# Altium PCB somiqboard.PcbDoc (part 5 of 10)
Units mm, origin at the board's own origin, x right, y up, seen from the top; angles counter-clockwise.
Board outline 110 x 96 mm, 4 copper layers (Top Layer, Ground_Plane, Power_Plane, Bottom Layer), stack 1.454 mm thick; 221 components, 356 nets, 1185 pads, 539 vias.
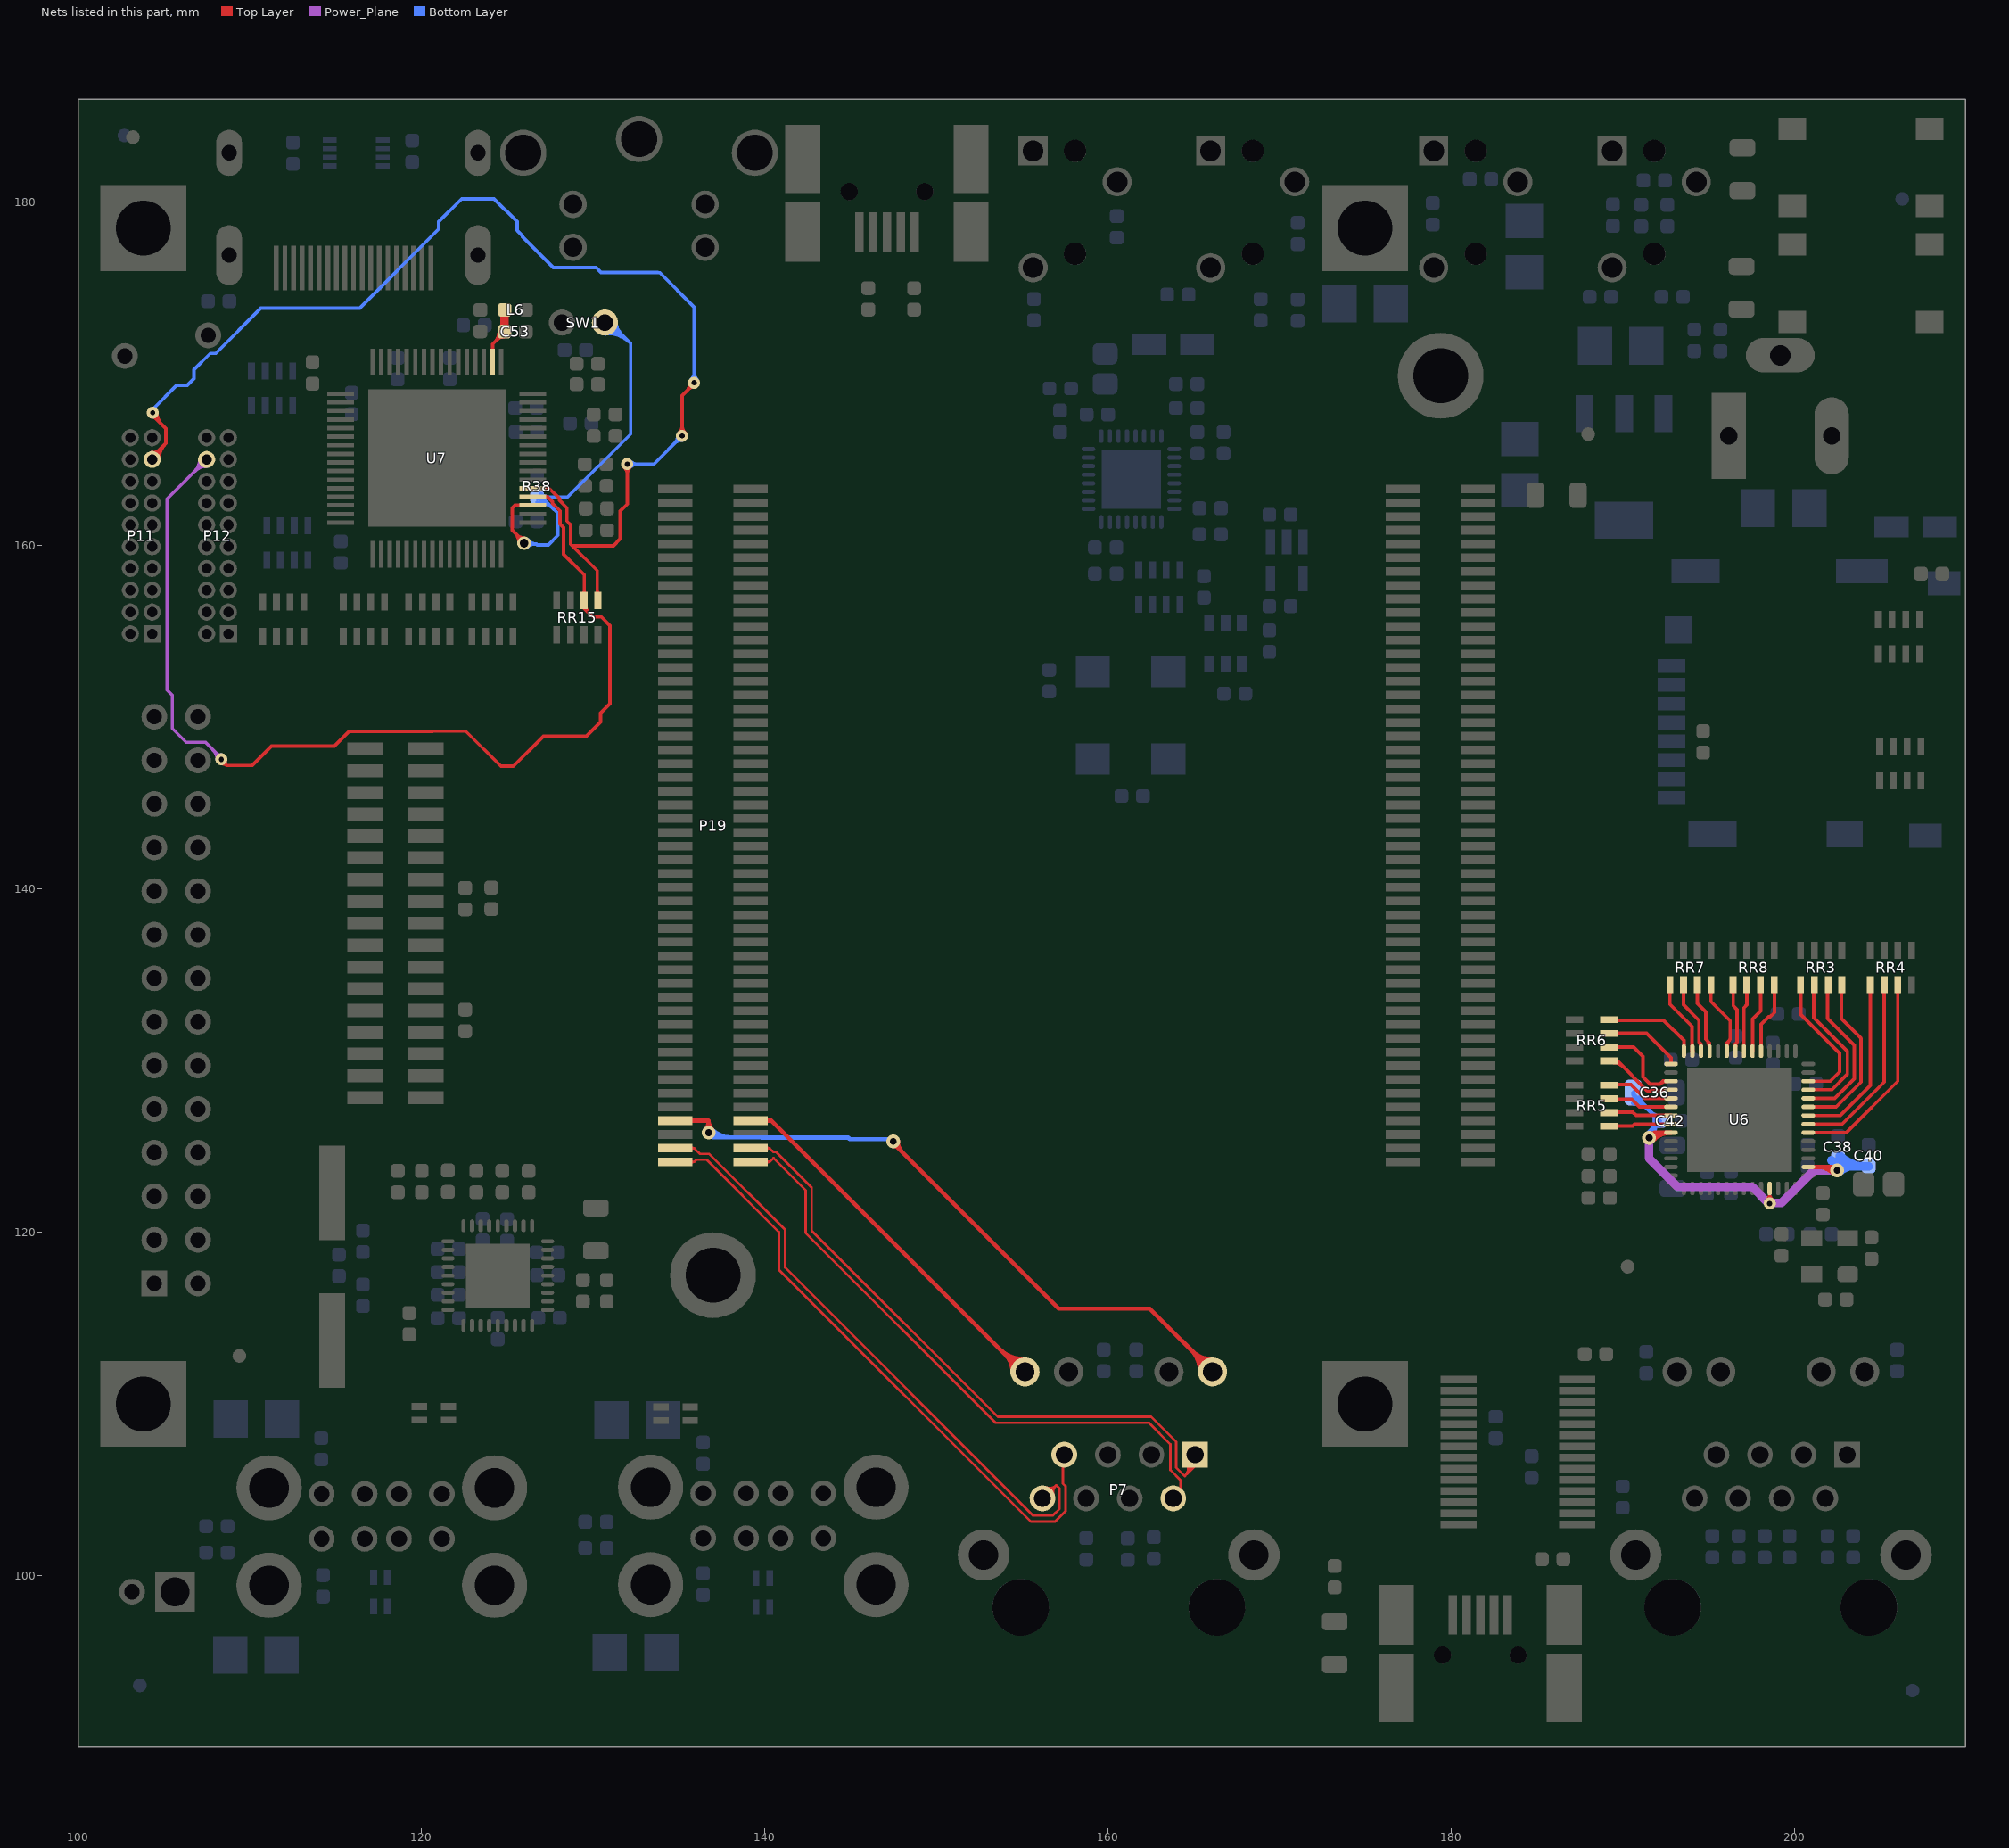
[diagram p7: the nets of this part, all layers, seen from the top]

## Via types
v1: diameter 0.7/0.7/0.7/0.7 (per signal layer), hole 0.3, Top Layer to Bottom Layer, tented both sides, 270 vias
v2: diameter 0.8, hole 0.3, Top Layer to Bottom Layer, tented both sides, 49 vias
v3: diameter 0.6/0.7/0.7/0.6 (per signal layer), hole 0.3, Top Layer to Bottom Layer, tented both sides, 47 vias
v4: diameter 0.6, hole 0.3, Top Layer to Bottom Layer, tented both sides, 43 vias
v5: diameter 1.1/1.1/1.1/1.1 (per signal layer), hole 0.6, Top Layer to Bottom Layer, tented both sides, 32 vias
v6: diameter 0.8/0.8/0.8/0.8 (per signal layer), hole 0.4, Top Layer to Bottom Layer, tented both sides, 31 vias
v7: diameter 0.9/0.9/0.9/0.9 (per signal layer), hole 0.5, Top Layer to Bottom Layer, tented both sides, 29 vias
v8: diameter 1.5/1.5/1.5/1.5 (per signal layer), hole 0.9, Top Layer to Bottom Layer, tented both sides, 14 vias
v9: diameter 1.2/1.2/1.2/1.2 (per signal layer), hole 0.6, Top Layer to Bottom Layer, tented both sides, 10 vias
v10: diameter 0.8/0.8/0.8/0.8 (per signal layer), hole 0.5, Top Layer to Bottom Layer, tented both sides, 6 vias
v11: diameter 1/1/1/1 (per signal layer), hole 0.5, Top Layer to Bottom Layer, tented both sides, 3 vias
v12: diameter 0.8/0.8/0.8/0.8 (per signal layer), hole 0.8, Top Layer to Bottom Layer, tented both sides, 2 vias
v13: diameter 1.2/1.2/1.2/1.2 (per signal layer), hole 1.2, Top Layer to Bottom Layer, tented both sides, 2 vias
v14: diameter 0.6/0.6/0.6/0.6 (per signal layer), hole 0.3, Top Layer to Bottom Layer, tented both sides, 1 vias

## Nets (pads, with @x,y where several pads share a name; then routed paths per layer and width w, separated by ;. In a path a pad name is that pad's centre, name@x,y a point inside that pad or via, vN(x,y) a via of type N, cw(c..) or ccw(c..) an arc to the next point about the centre after c; other vN are vias at no path point) (continued)
DVI_HSYNC: P12.18 RR15.6 U7.4 | length 65.7
  Top Layer w0.2: v1@108.35,147.55 108.35,147.5 108.65,147.2 ; v1@108.372,147.301 cw(c108.403,146.954) 108.65,147.2 ; v1@108.587,147.47 ccw(c108.836,147.386) 108.65,147.2 ; U7.4@126.504,162.85 127.372,162.85 127.65,162.572 127.65,162.469 128.085,162.034 128.085,161.271 128.3,161.056 128.3,159.5 129.5,158.3 129.5,156.75 RR15.6@129.489,156.739 ; U7.4@127.154,162.825 cw(c127.154,162.238) 127.569,162.653 ; RR15.6@129.418,157.184 ccw(c129.221,157.381) 129.5,157.381 ; RR15.6@129.489,156.813 RR15.6@129.489,156.739 ; 129.5,157.328 ccw(c129.704,157.328) RR15.6@129.56,157.184 ; RR15.6@129.589,156.513 ccw(c130.197,156.513) 129.767,156.083 ; 108.65,147.2 110.15,147.2 111.275,148.325 114.939,148.325 115.799,149.185 120.645,149.185 120.66,149.2 122.59,149.2 124.64,147.15 125.369,147.15 127.119,148.9 129.619,148.9 130.45,149.73 130.45,150.25 131,150.8 131,155.35 130.5,155.85 130,155.85 129.489,156.361 RR15.6@129.489,156.739
  Power_Plane w0.2: 106.548,148.55 106.3,148.55 105.495,149.355 105.495,151.289 105.2,151.584 105.2,162.731 P12.18@107.493,165.024 ; 106.55,148.548 107.42,148.548 v1@108.268,147.7 ; P12.18@107.093,165.024 cw(c106.127,165.024) 106.81,164.341 cw(c107.493,163.658) P12.18@107.493,164.624 ; 107.875,148.093 cw(c107.331,147.55) v1@108.1,147.55 ; 108.04,147.928 ccw(c108.35,148.238) v1@108.35,147.8
  other v1: 108.35,147.55
DVI_PVDD: C53.1 L6.2 U7.18 | length 4.5
  Top Layer w0.2: U7.18@124.154,170.7 124.154,171.746 C53.1@124.85,172.442 ; 124.306,171.898 ccw(c123.737,172.466) C53.1@124.541,172.466 ; 124.385,171.977 cw(c124.841,171.521) C53.1@124.841,172.166
  Top Layer w0.5: C53.1@124.85,172.442 L6.2@124.85,173.75
DVI_VREF: R38.2 SW1.2 U7.3 | length 32.3
  Top Layer w0.2: 125.453,160.747 cw(c124.855,160.15) v10@125.7,160.15 ; 125.573,160.627 ccw(c126,161.054) v10@126,160.45 ; v10(126,160.15) 126,160.2 125.3,160.9 125.3,162.2 125.45,162.35 U7.3@126.504,162.35
  Bottom Layer w0.2: v10@126.05,160.1 126.71,160.1 ; v10@126.212,159.938 cw(c126.604,159.546) 126.604,160.1 ; v10@126.238,160.333 ccw(c126.71,160.695) 126.71,160.1 ; R38.2@126.746,162.534 cw(c126.746,161.158) 127.719,162.131 ; R38.2@126.746,162.734 cw(c126.746,161.841) 127.378,162.472 ; R38.2@126.746,162.834 R38.2@127.016,162.834 ; R38.2@126.958,162.622 cw(c127.47,162.11) 127.47,162.834 cw(c127.47,163.558) R38.2@126.958,163.046 ; SW1.2@130.6,173 SW1.2@130.7,173 131,173 132.2,171.8 ; SW1.2@130.719,172.739 cw(c130.8,171.636) 131.582,172.418 ; SW1.2@130.734,172.539 cw(c130.843,171.06) 131.891,172.109 ; SW1.2@130.749,172.34 cw(c130.885,170.485) 132.2,171.8 ; SW1.2@131.362,173 ccw(c132.236,173) 131.618,172.382 ; 126.71,160.1 126.76,160.05 127.4,160.05 127.95,160.6 127.95,161.9 R38.2@127.016,162.834 ; R38.2@127.016,162.834 128.534,162.834 132.2,166.5 132.2,171.8
DVI_VSYNC: P11.17 RR15.5 U7.5 | length 80.2
  Top Layer w0.2: P11.17@104.318,165.024 104.318,165.163 105.118,165.963 105.118,166.818 v1@104.35,167.586 ; P11.17@104.318,165.424 ccw(c104.318,166.055) 104.764,165.609 ; v1@104.4,167.75 ccw(c104.915,167.75) 104.551,167.385 ; P11.17@104.518,165.024 cw(c105.336,165.024) 104.757,165.602 ; v1@104.6,167.75 ccw(c105.598,167.75) 104.892,167.044 ; P11.17@104.718,165.024 cw(c106.018,165.024) 105.099,165.943 ; U7.5@126.504,163.35 127.45,163.35 128,162.8 ; 128.05,162.738 128.05,162.634 128.485,162.199 128.485,161.436 128.7,161.221 128.7,160.1 128.8,160 ; RR15.5@130.25,156.95 130.25,158.55 128.8,160 ; 130.25,157.449 ccw(c130.625,157.449) RR15.5@130.36,157.184 ; RR15.5@130.289,156.813 RR15.5@130.303,156.813 ; v1@131.823,164.573 cw(c131.396,164.146) 132,164.146 cw(c132.604,164.146) v1@132.177,164.573 ; v1(132,164.75) 132,162.424 131.6,162.024 131.6,160.4 131.2,160 128.8,160 ; v1@135.023,166.577 ccw(c134.596,167.004) 135.2,167.004 ccw(c135.804,167.004) v1@135.377,166.577 ; v1(135.2,166.4) 135.2,168.75 135.9,169.45 v1(135.9,169.5) ; 135.438,168.988 ccw(c134.926,169.5) v1@135.65,169.5 ; 135.559,169.109 cw(c135.9,168.767) v1@135.9,169.25
  Bottom Layer w0.2: v1@104.35,167.95 105.75,169.35 106.369,169.35 106.75,169.731 106.75,170.25 107.703,171.203 108.018,171.203 110.655,173.84 116.413,173.84 121.023,178.45 121.023,178.872 122.358,180.207 124.247,180.207 125.583,178.872 125.583,178.37 125.903,178.05 125.903,177.997 127.7,176.2 130.2,176.2 130.475,175.925 133.787,175.925 133.807,175.905 133.895,175.905 135.9,173.9 v1(135.9,169.5) ; v1(132,164.75) 133.55,164.75 v1(135.2,166.4) ; v1@132.177,164.573 cw(c132.604,164.146) 132.604,164.75 cw(c132.604,165.354) v1@132.177,164.927 ; v1@134.95,166.4 cw(c134.346,166.4) 134.773,165.973 cw(c135.2,165.546) v1@135.2,166.15 ; v1@135.723,169.677 ccw(c135.296,170.104) 135.9,170.104 ccw(c136.504,170.104) v1@136.077,169.677
  other v1: 104.35,167.75
ECORE_1V8: C36.1 C38.2 C40.2 C42.2 U6.2 U6.37 U6.53 | length 42.4
  Top Layer w0.15: v1@198.38,121.87 ccw(c197.91,122.34) 198.574,122.34 ccw(c199.238,122.34) v1@198.768,121.87 ; v1(198.574,121.676) U6.53@198.574,122.555
  Top Layer w0.25: v6(191.55,125.5) 191.855,125.805 ; v6@191.569,125.484 cw(c192.275,124.869) 192.275,125.805 ; v6@191.644,125.758 ccw(c191.713,125.947) 191.855,125.805 ; v6@191.757,125.319 cw(c192.824,124.391) U6.37@192.824,125.805 191.855,125.805 ; v6@191.808,125.594 cw(c191.997,125.663) 191.855,125.805 ; U6.2@200.824,123.805 v6@202.295,123.805 ; 201.341,123.805 cw(c201.341,122.441) v6@202.306,123.406 ; 201.945,123.805 cw(c201.945,123.045) v6@202.482,123.582
  Power_Plane w0.5: v6@191.55,125.6 v6(191.55,125.5) 191.55,124.3 193.2,122.65 197.55,122.65 198.5,121.7 199.25,121.7 201.15,123.6 v6(202.5,123.6)
  Bottom Layer w0.25: C36.1@190.627,127.518 cw(c190.627,126.267) 191.511,127.152 ; C36.1@190.627,127.768 cw(c190.627,127.121) C36.1@191.085,127.578 ; C36.1@190.65,128.15 190.65,128.013 C42.2@192.171,126.492 191.55,125.85 v6(191.55,125.5) ; C36.1@191.002,127.893 ccw(c191.562,127.893) 191.166,127.497 ; v6@191.575,125.502 cw(c192.326,125.568) 191.784,126.092 ; v6@191.824,125.524 cw(c193.05,125.631) C42.2@192.165,126.486 ; C42.2@191.896,126.487 cw(c191.232,126.476) 191.709,126.015 cw(c192.187,125.553) C42.2@192.176,126.217 ; C42.2@191.896,126.492 ccw(c191.232,126.492) 191.702,126.961 ccw(c192.171,127.431) C42.2@192.171,126.767 ; v6@202.318,123.806 ccw(c201.836,124.353) C38.2@202.565,124.353 v6@202.565,123.715 ; C38.2@202.376,124.153 cw(c201.963,123.715) v6@202.565,123.715 ; v6@202.446,123.87 ccw(c202.39,124.144) 202.661,124.071 ccw(c203.005,123.979) v6@202.72,123.765 ; v6@202.45,123.6 v6@202.565,123.715 ; v6(202.5,123.6) v6@202.65,123.45 ; C38.2@202.5,124.3 C38.2@202.6,124.4 ; C38.2@202.565,124.107 ccw(c203.007,124.107) v6@202.694,123.794 ; C38.2@202.754,124.153 ccw(c203.167,123.715) v6@202.565,123.715
  Bottom Layer w0.5: C38.2@202.177,124.192 cw(c201.941,123.812) v6@202.36,123.653 ; C38.2@202.318,124.106 ccw(c202.946,124.734) 202.946,123.845 ; v6(202.5,123.6) 202.745,123.845 C40.2@204.343,123.845 ; v6@202.606,123.494 cw(c203.454,122.646) 203.454,123.845 ; v6@202.644,123.557 cw(c203.011,123.446) 203.073,123.824 ; C38.2@202.671,124.459 ccw(c204.154,125.942) C40.2@204.154,123.845
ETH_A1: RR3.1 U6.12 | length 8.5
  Top Layer w0.2: RR3.1@200.309,134.058 cw(c200.139,133.888) 200.38,133.888 cw(c200.621,133.888) RR3.1@200.451,134.058 ; RR3.1@200.38,134.429 200.38,132.67 200.45,132.6 200.469,132.6 202.65,130.419 202.65,129.35 202.1,128.8 200.829,128.8 U6.12@200.824,128.805
ETH_A2: RR3.2 U6.11 | length 9
  Top Layer w0.2: U6.11@200.824,128.305 202.205,128.305 203.1,129.2 203.1,130.55 201.15,132.5 RR3.2@201.15,134.5 ; 201.15,133.815 cw(c201.494,133.815) RR3.2@201.251,134.058
ETH_A3: RR3.3 U6.10 | length 9.6
  Top Layer w0.2: U6.10@200.824,127.805 202.355,127.805 203.5,128.95 203.5,130.9 201.95,132.45 RR3.3@201.95,134.5 ; 201.95,133.815 cw(c202.294,133.815) RR3.3@202.051,134.058
ETH_A4: RR3.4 U6.9 | length 10.1
  Top Layer w0.2: U6.9@200.824,127.305 202.455,127.305 203.9,128.75 203.9,131.3 202.75,132.45 202.75,134.4 RR3.4@202.7,134.45 ; 202.75,133.815 cw(c203.094,133.815) RR3.4@202.851,134.058
ETH_A5: RR4.1 U6.8 | length 10.6
  Top Layer w0.2: U6.8@200.824,126.805 202.705,126.805 204.45,128.55 RR4.1@204.45,134.45 ; RR4.1@204.373,134.058 cw(c204.188,133.873) 204.45,133.873 ; 204.45,133.902 cw(c204.671,133.902) RR4.1@204.515,134.058
ETH_A6: RR4.2 U6.7 | length 11.5
  Top Layer w0.2: U6.7@200.824,126.305 202.805,126.305 205.25,128.75 RR4.2@205.25,134.45 ; RR4.2@205.173,134.058 cw(c204.988,133.873) 205.25,133.873 ; 205.25,133.902 cw(c205.471,133.902) RR4.2@205.315,134.058
ETH_A7: RR4.3 U6.6 | length 12.4
  Top Layer w0.2: U6.6@200.824,125.805 203.045,125.805 206.04,128.8 206.04,134.34 RR4.3@206.05,134.35 ; RR4.3@205.973,134.058 cw(c205.812,133.897) 206.04,133.897 ; 206.04,133.878 cw(c206.295,133.878) RR4.3@206.115,134.058
ETH_ACT: P7.12 P19.93 | length 26.9
  Top Layer w0.25: P19.93@139.2,126.5 140.4,126.5 154.85,112.05 P7.12@155.1,112.05 ; P19.93@140.038,126.412 cw(c140.252,126.198) 140.252,126.5 cw(c140.252,126.802) P19.93@140.038,126.588 ; 153.686,113.214 ccw(c155.18,114.707) P7.12@155.18,112.595 ; 154.048,112.852 cw(c153.067,111.87) P7.12@154.455,111.87 ; 154.113,112.787 ccw(c155.18,113.854) P7.12@155.18,112.345 ; 154.475,112.425 cw(c153.92,111.87) P7.12@154.705,111.87
ETH_ALINK: P7.9 P19.94 | length 47
  Top Layer w0.25: P19.94@134.8,126.5 136.75,126.5 v6(136.75,125.8) ; P19.94@135.638,126.412 cw(c135.852,126.198) 135.852,126.5 cw(c135.852,126.802) P19.94@135.638,126.588 ; v6@136.556,125.994 ccw(c136.086,126.464) 136.75,126.464 ccw(c137.414,126.464) v6@136.944,125.994 ; v6@147.5,125.025 cw(c147.5,124.603) 147.799,124.901 ; v6@147.5,125.2 157.15,115.55 162.45,115.55 P7.9@166.15,111.85 ; v6@147.775,125.3 ccw(c148.68,125.3) 148.04,124.66 ; 164.858,113.142 cw(c163.586,111.87) P7.9@165.385,111.87 ; 164.906,113.094 ccw(c166.11,114.297) P7.9@166.11,112.595 ; 165.285,112.715 cw(c164.44,111.87) P7.9@165.635,111.87 ; 165.333,112.667 ccw(c166.11,113.443) P7.9@166.11,112.345
  Bottom Layer w0.25: v6(136.75,125.8) 137.019,125.531 139.799,125.531 139.816,125.515 144.88,125.515 144.97,125.425 v6@147.6,125.425 ; v6@136.768,125.818 ccw(c137.46,126.51) 137.46,125.531 ; v6@136.944,125.994 ccw(c138.063,127.113) 138.063,125.531
  other v6: 147.5,125.3
ETH_D0: RR5.1 U6.36 | length 3.9
  Top Layer w0.21: RR5.1@189.2,126.2 190.6,126.2 190.705,126.305 U6.36@192.824,126.305 ; RR5.1@189.571,126.107 cw(c189.796,125.882) 189.796,126.2
ETH_D1: RR5.2 U6.35 | length 4
  Top Layer w0.21: RR5.2@189.15,127 190.6,127 190.795,126.805 U6.35@192.824,126.805 ; RR5.2@189.571,126.907 cw(c189.796,126.682) 189.796,127
ETH_D2: RR5.3 U6.34 | length 4.1
  Top Layer w0.21: RR5.3@189.15,127.75 190.55,127.75 190.995,127.305 U6.34@192.824,127.305 ; RR5.3@189.571,127.841 ccw(c189.791,128.061) 189.791,127.75
ETH_D3: RR5.4 U6.33 | length 4.3
  Top Layer w0.21: RR5.4@189.15,128.6 190.493,128.6 191.288,127.805 U6.33@192.824,127.805 ; RR5.4@189.571,128.507 cw(c189.796,128.282) 189.796,128.6
ETH_D4: RR6.1 U6.32 | length 5.6
  Top Layer w0.21: RR6.1@189.1,130 189.673,130 191.438,128.235 192.361,128.235 ; RR6.1@189.504,129.889 cw(c189.504,129.214) 189.981,129.691 ; 192.331,128.235 ccw(c192.331,128.523) U6.32@192.535,128.319 ; U6.32@192.533,128.317 cw(c192.361,128.455) 192.361,128.235 ; U6.32@192.544,128.286 ccw(c192.498,128.098) 192.361,128.235 ; U6.32@192.824,128.305 192.432,128.305 192.361,128.235
ETH_D5: RR6.2 U6.31 | length 6.1
  Top Layer w0.21: RR6.2@189.05,130.8 190.65,130.8 191.195,130.255 191.195,129.058 191.608,128.645 192.192,128.645 ; RR6.2@189.571,130.717 cw(c189.772,130.516) 189.772,130.8 ; U6.31@192.548,128.785 ccw(c192.531,128.305) 192.192,128.645 ; U6.31@192.824,128.805 192.352,128.805 192.192,128.645
ETH_D6: RR6.3 U6.29 | length 4.8
  Top Layer w0.21: RR6.3@189.2,131.6 191.4,131.6 192.824,130.176 U6.29@192.824,129.805 ; RR6.3@189.571,131.517 cw(c189.772,131.316) 189.772,131.6
ETH_D7: RR6.4 U6.28 | length 5.9
  Top Layer w0.21: RR6.4@189.1,132.35 192.398,132.35 193.574,131.174 U6.28@193.574,130.555 ; RR6.4@189.571,132.451 ccw(c189.815,132.695) 189.815,132.35
ETH_D8: RR7.1 U6.27 | length 4.8
  Top Layer w0.2: RR7.1@192.689,134.058 cw(c192.519,133.888) 192.76,133.888 cw(c193.001,133.888) RR7.1@192.831,134.058 ; RR7.1@192.76,134.429 192.76,133.29 194.05,132 194.05,130.6 U6.27@194.1,130.55
ETH_D9: RR7.2 U6.26 | length 5
  Top Layer w0.2: RR7.2@193.489,134.058 cw(c193.343,133.912) 193.55,133.912 ; 193.55,133.863 cw(c193.826,133.863) RR7.2@193.631,134.058 ; RR7.2@193.55,134.5 193.55,133.25 194.45,132.35 194.45,131.094 ; U6.26@194.549,130.832 ccw(c194.209,130.854) 194.45,131.094 ; U6.26@194.574,130.555 194.574,130.97 194.45,131.094
ETH_D10: RR7.3 U6.25 | length 5
  Top Layer w0.2: RR7.3@194.289,134.058 cw(c194.119,133.888) 194.36,133.888 cw(c194.601,133.888) RR7.3@194.431,134.058 ; 194.35,133.35 194.36,133.34 ; RR7.3@194.36,134.429 194.36,133.34 ; 194.886,131.224 cw(c194.491,130.83) U6.25@195.049,130.83 ; U6.25@195.074,130.555 195.074,131.036 194.85,131.26 194.85,132.85 194.36,133.34
ETH_D11: RR7.4 U6.23 | length 5.3
  Top Layer w0.2: RR7.4@195.089,134.058 cw(c194.943,133.912) 195.15,133.912 ; 195.15,133.863 cw(c195.426,133.863) RR7.4@195.231,134.058 ; RR7.4@195.15,134.5 195.15,133.45 196.274,132.326 196.274,131.236 196.074,131.036 U6.23@196.074,130.555 ; U6.23@196.099,130.83 cw(c196.657,130.83) 196.262,131.224
ETH_D12: RR8.1 U6.22 | length 4.7
  Top Layer w0.2: RR8.1@196.372,134.058 cw(c196.185,133.871) 196.45,133.871 ; 196.45,133.904 cw(c196.668,133.904) RR8.1@196.514,134.058 ; RR8.1@196.45,134.45 196.45,133.2 196.674,132.976 196.674,131.07 ; U6.22@196.574,130.555 196.574,130.97 196.674,131.07 ; U6.22@196.599,130.834 cw(c196.865,130.879) 196.674,131.07
ETH_D13: RR8.2 U6.21 | length 4.3
  Top Layer w0.2: U6.21@197.074,130.555 197.074,133.074 197.25,133.25 RR8.2@197.25,134.45 ; RR8.2@197.172,134.058 cw(c196.985,133.871) 197.25,133.871 ; 197.25,133.904 cw(c197.468,133.904) RR8.2@197.314,134.058
ETH_D14: RR8.3 U6.20 | length 4.5
  Top Layer w0.2: U6.20@197.574,130.555 197.574,132.424 198.05,132.9 RR8.3@198.05,134.5 ; RR8.3@197.972,134.058 cw(c197.785,133.871) 198.05,133.871 ; 198.05,133.904 cw(c198.268,133.904) RR8.3@198.114,134.058
ETH_D15: RR8.4 U6.19 | length 4.6
  Top Layer w0.2: U6.19@198.074,130.555 198.074,132.114 198.51,132.55 198.6,132.55 198.85,132.8 RR8.4@198.85,134.4 ; RR8.4@198.772,134.058 cw(c198.585,133.871) 198.85,133.871 ; 198.85,133.904 cw(c199.068,133.904) RR8.4@198.914,134.058
ETH_RX_N: P7.8 P19.98 | length 37.8
  Top Layer w0.144: P19.98@134.8,124.9 135.9,124.9 ; P19.98@135.694,124.795 cw(c135.9,124.645) 135.9,124.9 ; P19.98@135.694,125.005 ccw(c135.9,125.155) 135.9,124.9 ; P7.8@156.235,104.5 156.985,105.25 ; P7.8@156.39,104.999 ccw(c156.537,105.384) 156.828,105.093 ; P7.8@156.441,105.134 ccw(c156.623,105.612) 156.985,105.25 ; P7.8@156.711,104.657 cw(c157.116,104.781) 156.816,105.081 ; P7.8@156.848,104.699 cw(c157.375,104.86) 156.985,105.25 ; 135.9,124.9 136.227,124.573 136.769,124.573 141.194,120.148 141.194,117.956 155.656,103.494 156.794,103.494 157.2,103.9 157.2,105.064 157.014,105.25 156.985,105.25
ETH_RX_P: P7.7 P19.100 | length 36.9
  Top Layer w0.144: P19.100@134.8,124.1 135.9,124.1 ; P19.100@135.694,123.995 cw(c135.9,123.845) 135.9,124.1 ; P19.100@135.694,124.205 ccw(c135.9,124.355) 135.9,124.1 ; P7.7@157.505,107.04 157.393,106.928 157.393,105.357 157.544,105.206 157.544,103.758 156.936,103.15 155.514,103.15 140.85,117.814 140.85,120.006 136.627,124.229 136.029,124.229 135.9,124.1
ETH_TX_N: P7.2 P19.99 | length 37
  Top Layer w0.144: P19.99@139.2,124.1 140.3,124.1 ; P19.99@140.094,123.995 cw(c140.3,123.845) 140.3,124.1 ; P19.99@140.094,124.205 ccw(c140.3,124.355) 140.3,124.1 ; P7.2@163.855,104.5 164.25,104.895 164.25,105.55 163.65,106.15 163.65,107.65 162.394,108.906 153.452,108.906 142.406,119.952 142.406,122.45 140.528,124.328 140.3,124.1
ETH_TX_P: P7.1 P19.97 | length 41.8
  Top Layer w0.144: P19.97@139.2,124.9 140.3,124.9 ; P19.97@140.094,124.795 cw(c140.3,124.645) 140.3,124.9 ; P19.97@140.094,125.005 ccw(c140.3,125.155) 140.3,124.9 ; P7.1@164.55,106.63 cw(c164.042,106.244) 164.493,105.793 ; 164.61,105.91 ccw(c164.175,106.345) P7.1@164.665,106.717 ; 164.727,106.027 ccw(c164.308,106.446) P7.1@164.779,106.804 ; 164.843,106.143 ccw(c164.44,106.546) P7.1@164.894,106.891 ; 164.96,106.26 ccw(c164.573,106.647) P7.1@165.009,106.978 ; P7.1@165.125,107.04 165.125,106.425 164.493,105.793 ; 140.3,124.9 140.528,124.672 140.678,124.672 142.75,122.6 142.75,120.094 153.594,109.25 162.536,109.25 163.994,107.792 163.994,106.292 164.493,105.793